# Altium PCB NEOIVClock.PcbDoc (part 1 of 2)
Units mm, origin at the board's own origin, x right, y up, seen from the top; angles counter-clockwise.
Board outline 205.8 x 119 mm, 2 copper layers (Top Layer, Bottom Layer); 87 components, 87 nets, 479 pads, 552 vias.
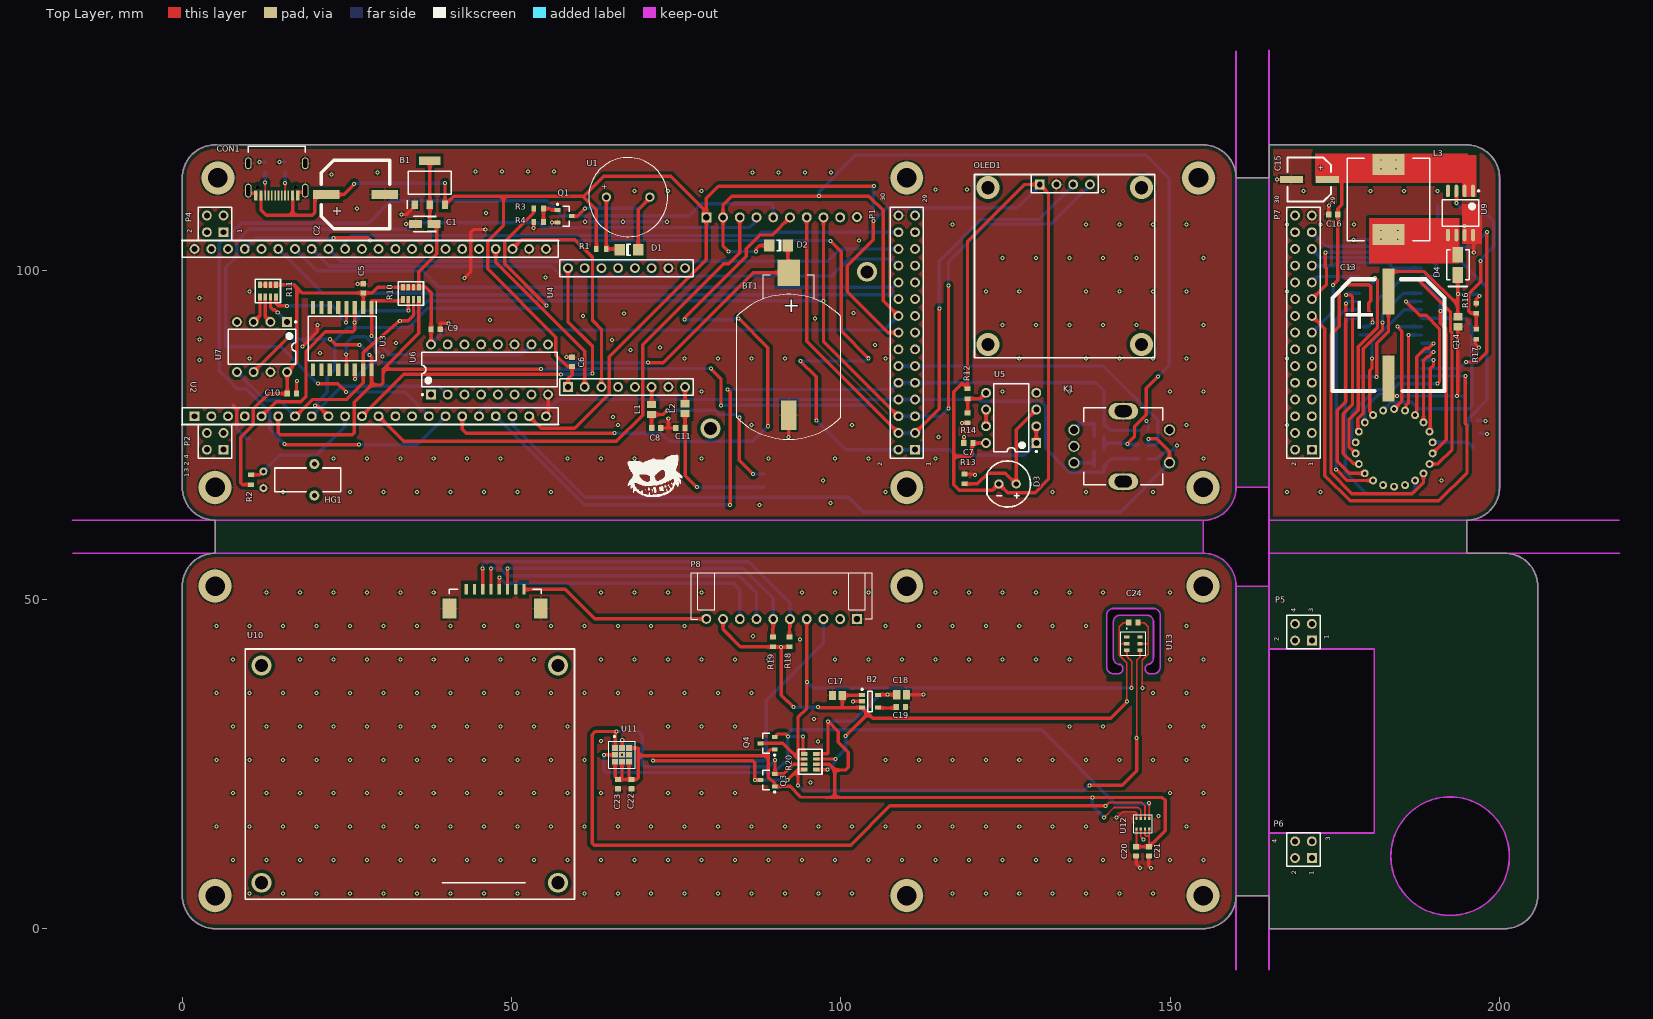
[diagram p0: Top Layer view]
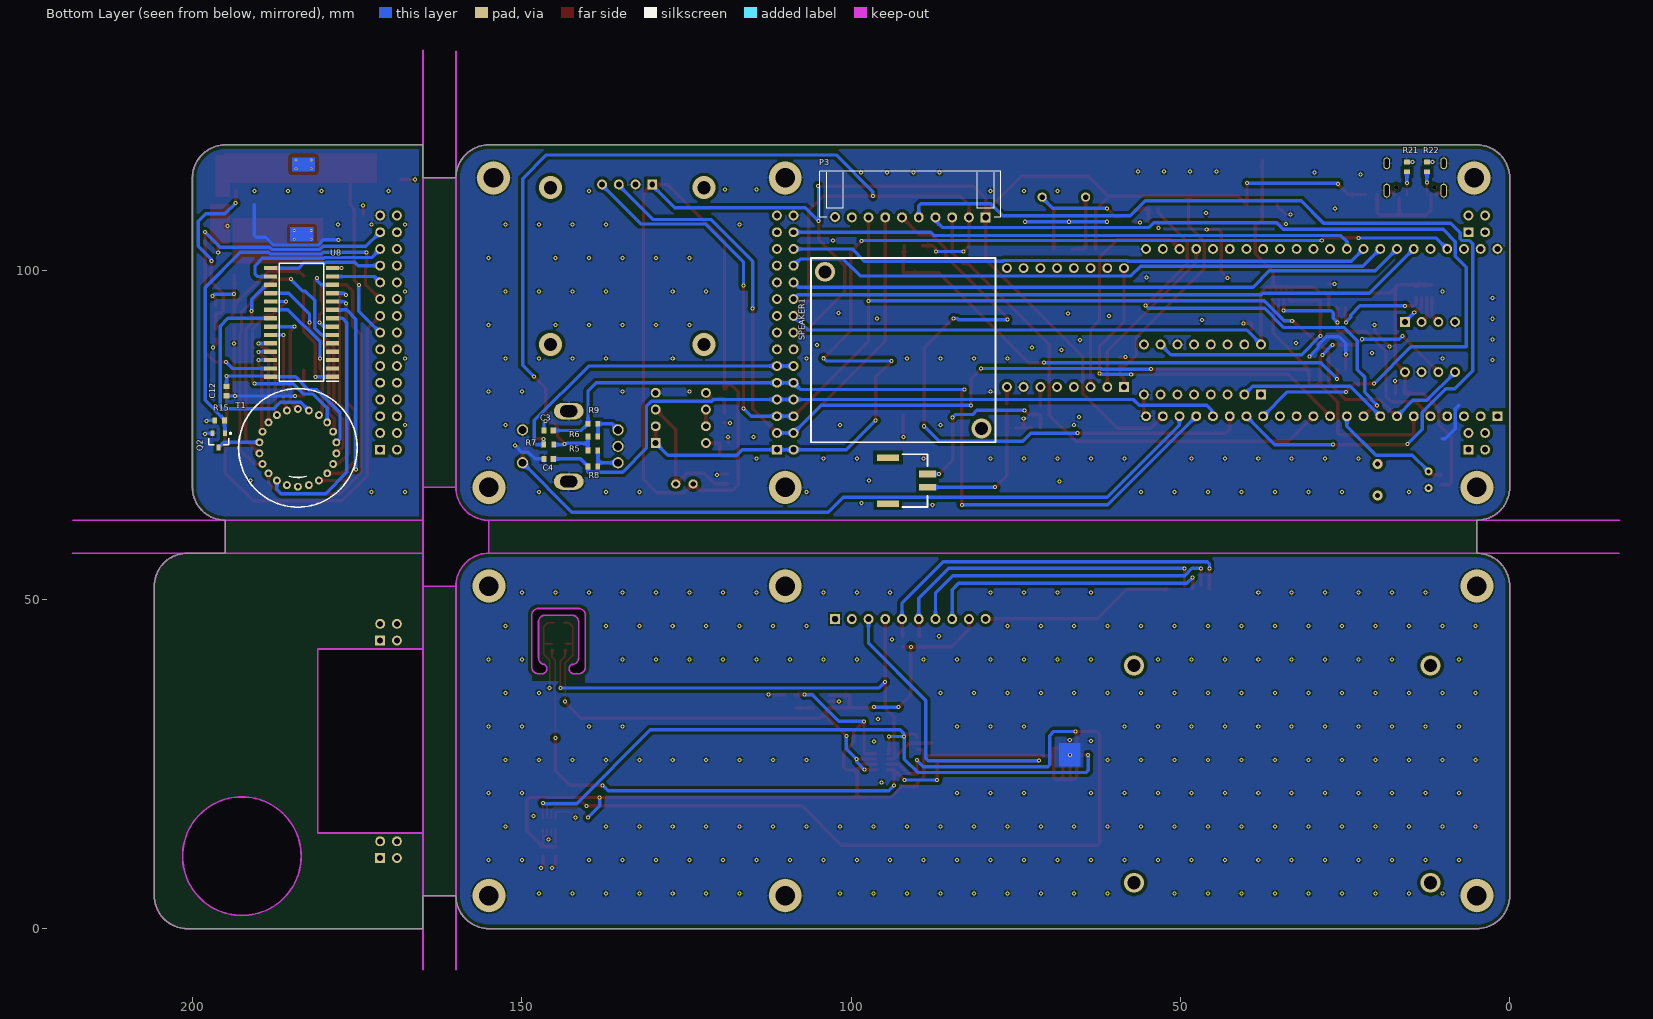
[diagram p1: Bottom Layer view, seen from below]

## Layer stack, top to bottom
Top Solder: solder mask 0.0102, Solder Resist, Dk 3.5
Top Layer: signal copper 0.0356
Dielectric 1: dielectric 0.32, FR-4, Dk 4.8
Bottom Layer: signal copper 0.0356
Bottom Solder: solder mask 0.0102, Solder Resist, Dk 3.5

## Board outline
5,0 cw(c5,5) 0,5 0,52 cw(c5,52) 5,57 5,62 cw(c5,67) 0,67 0,114 cw(c5,114) 5,119 155,119 cw(c155,114) 160,114 165,114 165,119 195,119 cw(c195,114) 200,114 200,67 cw(c195,67) 195,62 195,57 200.8,57 cw(c200.8,52) 205.8,52 205.8,5 cw(c200.8,5) 200.8,0 165,0 165,5 160,5 cw(c155,5) 155,0
cut-out: 155,57 cw(c155,52) 160,52 165,52 164.991,52.009 164.991,57 165,57 165,67 160,67 cw(c155,67) 155,62
cut-out: 183.5,11 ccw(c192.5,11) 192.5,2 ccw(c192.5,11) 201.5,11 ccw(c192.5,11) 192.5,20 ccw(c192.5,11)
cut-out: 140.351,39.719 ccw(c141.367,39.719) 141.367,38.703 142.053,38.703 ccw(c142.053,39.465) 142.456,40.112 142.383,40.1 cw(c142.383,41.116) 141.367,41.116 141.367,46.577 cw(c142.383,46.577) 142.383,47.593 146.447,47.593 cw(c146.447,46.577) 147.463,46.577 147.463,41.122 cw(c146.447,41.122) 146.518,40.108 146.552,40.112 ccw(c146.955,39.465) 146.955,38.703 146.955,38.697 147.457,38.697 147.463,38.703 ccw(c147.463,39.719) 148.479,39.719 148.479,47.593 ccw(c147.463,47.593) 147.463,48.609 141.367,48.609 ccw(c141.367,47.593) 140.351,47.593
cut-out: 165,14.53 165,42.47 181,42.47 181,14.53

## Design rules (kind name [scope] priority, off if disabled: settings)
Clearance Clearance_ROOM_BMP280 [All] p1: gap=0.17 ignorepadtopadclearanceinfootprint=TRUE except(0.508: Arc-Poly Track-Poly SMDPad-Poly THPad-Poly Via-Poly Fill-Poly Poly-Poly)
Clearance Clearance_BMP280 [HasFootprint('BMP280')] p2: gap=0.2 ignorepadtopadclearanceinfootprint=TRUE except(0.508: Arc-Poly Track-Poly SMDPad-Poly THPad-Poly Via-Poly Fill-Poly Poly-Poly)
Clearance Clearance_USB [HasFootprint('USB-TYPE_C')] p3: gap=0.17 ignorepadtopadclearanceinfootprint=TRUE except(0.508: Arc-Poly Track-Poly SMDPad-Poly THPad-Poly Via-Poly Fill-Poly Poly-Poly)
Clearance Clearance_8P4R [HasFootprint('8P4R 0603')] p4: gap=0.3 ignorepadtopadclearanceinfootprint=TRUE except(0.508: Arc-Poly Track-Poly SMDPad-Poly THPad-Poly Via-Poly Fill-Poly Poly-Poly)
Clearance [All] p5: gap=0.508 ignorepadtopadclearanceinfootprint=TRUE
ComponentClearance [All] p1: gap=0.254 collisioncheckmode=3 verticalgap=0 showdistances=FALSE donotcheckwithout3dbody=TRUE
HoleSize [All] p1: absolutevalues=TRUE maxlimit=3 minlimit=0.025 maxpercent=80.000 minpercent=20.000
MinimumSolderMaskSliver MinimumSolderMaskSliver_ENS60 [HasFootprint('ENS160')] p1: minsoldermaskwidth=0.1
MinimumSolderMaskSliver MinimumSolderMaskSliver_SOT23-5AL [HasFootprint('SOT23-5AL')] p2: minsoldermaskwidth=0.09
MinimumSolderMaskSliver MinimumSolderMaskSliver_BMP280 [HasFootprint('BMP280')] p3: minsoldermaskwidth=0.09
MinimumSolderMaskSliver MinimumSolderMaskSliver_R_PACK [HasFootprint('8P4R 0603')] p4: minsoldermaskwidth=0.04
MinimumSolderMaskSliver MinimumSolderMaskSliver_L [HasFootprint('CAPC2012L')] p5: minsoldermaskwidth=0.19
MinimumSolderMaskSliver MinimumSolderMaskSliver_USB [HasFootprint('USB-TYPE_C')] p6: minsoldermaskwidth=0.04
MinimumSolderMaskSliver [All] p7: minsoldermaskwidth=0.254
PolygonConnect [All] p1: connectstyle=Relief reliefconductorwidth=0.254 reliefentries=4 polygonreliefangle="90 Angle" airgapwidth=0.254
RoomDefinition RoomBMP280 [False] p1: confinementstyle=ConfineIn formatcopy=TRUE lockcomponents=FALSE outline 148.138,13.9 143.566,13.9 143.566,17.964 148.138,17.964
RoutingLayers RoutingLayers_EX_GND [InNetClass('GND')] p1: top layer_v5=FALSE bottom layer_v5=FALSE
RoutingLayers [All] p2: top layer_v5=TRUE bottom layer_v5=TRUE
RoutingPriority RoutingPriority_Clock [InNetClass('Clock')] p1: routingpriority=0
RoutingPriority RoutingPriority_I2C [InNetClass('I2C')] p2: routingpriority=1
RoutingPriority RoutingPriority_IV18 [InNetClass('IV18')] p3: routingpriority=2
RoutingPriority [All] p4: routingpriority=10
RoutingVias [All] p1: holewidth=0.305 width=0.61 viastyle="Through Hole" minholewidth=0.305 minwidth=0.61 maxholewidth=0.305 maxwidth=0.61
SMDEntry [All] p1: side=TRUE corner=TRUE anyangle=TRUE
SilkToSolderMaskClearance SilkToSolderMaskClearance_MAZ [HasFootprint('SOIC127P1032X265-28N')] p1: minsilkscreentomaskgap=0.1 clearancetoexposedcopper=TRUE
SilkToSolderMaskClearance SilkToSolderMaskClearance_2312 [HasFootprint('SOIC127P1032X265-16N')] p2: minsilkscreentomaskgap=0.1 clearancetoexposedcopper=TRUE
SilkToSolderMaskClearance SilkToSolderMaskClearance_BMP280 [HasFootprint('BMP280')] p3: minsilkscreentomaskgap=0.18 clearancetoexposedcopper=TRUE
SilkToSolderMaskClearance SilkToSolderMaskClearance_RES_PACK [HasFootprint('8P4R 0603')] p4: minsilkscreentomaskgap=0.1 clearancetoexposedcopper=TRUE
SilkToSolderMaskClearance SilkToSolderMaskClearance_CD3216-1206 [HasFootprint('CD3216-1206')] p5: minsilkscreentomaskgap=0.2 clearancetoexposedcopper=TRUE
SilkToSolderMaskClearance [IsPad] p6: minsilkscreentomaskgap=0.254 clearancetoexposedcopper=TRUE
SolderMaskExpansion [All] p1: expansion=0.102 istentingtop=FALSE
SupplyNets "Schematic Supply Nets_3" [InNet('5V')] p1: voltage=0.000
SupplyNets "Schematic Supply Nets_6" [InNet('B_1.8V')] p2: voltage=0.000
SupplyNets "Schematic Supply Nets_5" [InNet('R_GND')] p3: voltage=0.000
SupplyNets "Schematic Supply Nets_2" [InNet('GND')] p4: voltage=0.000
SupplyNets "Schematic Supply Nets_1" [InNet('B_3.3V')] p5: voltage=0.000
SupplyNets "Schematic Supply Nets" [InNet('B_GND')] p6: voltage=0.000
Width [All] p1: maxlimit=1.016 minlimit=0.254 preferedwidth=0.508
24 further rules are at their usual default settings.

## Classes and differential pairs
net class Clock: DS3231_32HZ DS3231_CLK DS3231_INT DS3231_RST
net class IV18: IV18_BLANK IV18_CLK IV18_DIN IV18_EN IV18_LOAD
net class I2C: B_I2C_SCL B_I2C_SDA I2C_SCL I2C_SDA
net class GND: B_GND GND R_GND
component class TopPannel: B1 BT1 C1 C2 C3 C4 C5 C6 C7 C8 C9 C10 C11 CON1 D1 D2 D3 "Header 2X2" HG1 K1 L1 L2 OLED1 P1 P2 P3 P4 P5 P6 Q1 R1 R2 R3 R4 R5 R6 R7 R8 R9 R10 R11 R12 R13 R14 R21 R22 SPEAKER1 U1 U2 U3 U4 U5 U6 U7
component class RightPannel: C12 C13 C14 C15 C16 D4 "Header 2X2" L3 P7 Q2 R15 R16 R17 T1 U8 U9
component class BottomPanel: B2 C17 C18 C19 C20 C21 C22 C23 C24 "Header 2X2" P8 Q3 Q4 R18 R19 R20 U10 U11 U12 U13

## Components (designator, comment, footprint, x,y, rotation, side; value= is the part's Value field where it differs from the comment)
B1 "AMS1117" SOT229P700X180-4N 37.592,113.236 r90 top
B2 "RT9193-18" SOT23-5AL 104.425,34.512 r0 top
BT1 "ML2032" BAT2025-2032-L 92.075,85.296 r0 top
C1 "16V" TC3216-1206 36.83,106.999 r180 top value=22uF
C2 "25V" SMD-EC-F10 21.874,111.458 r0 top value=470uF
C3 "50V" CAPC1608L 145.923,75.644 r180 bottom value=104
C4 "50V" CAPC1608L 145.923,71.326 r180 bottom value=104
C5 "50V" CAPC1608L 27.474,97.21 r270 top value=104
C6 "50V" CAPC1608L 59.196,86.058 r90 top value=104
C7 "50V" CAPC1608L 119.372,73.731 r0 top value=104
C8 "50V" CAPC1608L 71.961,76.025 r180 top value=104
C9 "50V" CAPC1608L 38.481,91.011 r180 top value=104
C10 "50V" CAPC1608L 16.637,81.232 r180 top value=104
C11 "50V" CAPC1608L 75.641,76.025 r180 top value=104
C12 "50V" CAPC1608L 194.818,81.613 r90 bottom value=104
C13 "100V" SMD-EC-F16 183.134,96.733 r270 top value=220uF
C14 "100V" CAPC2012L 193.675,92.154 r90 top value=105
C15 "50V" SMD-EC-F6.3 173.863,113.744 r180 top value=47uF
C16 "50V" CAPC1608L 174.752,108.41 r0 top value=105
C17 "100V" CAPC2012L 99.472,35.401 r0 top value=105
C18 "100V" CAPC2012L 109.22,35.528 r180 top value=105
C19 "50V" CAPC1608L 109.093,33.623 r180 top value=223
C20 "50V" CAPC1608L 144.836,11.741 r90 top value=104
C21 "50V" CAPC1608L 146.765,11.741 r90 top value=104
C22 "50V" CAPC1608L 68.212,21.939 r90 top value=104
C23 "10V" CAPC1608L 66.18,21.939 r90 top value=106
C24 "10V" CAPC1608L 144.415,46.45 r180 top value=106
CON1 "USB-TYPEE_C" USB-TYPE_C 14.349,111.505 r180 top
D1 "S4" CD3216-1206 67.818,103.076 r180 top
D2 "S4" CD3216-1206 90.551,103.711 r0 top
D3 "5800B" 5800B 125.299,67.516 r180 top
D4 "SS310" DO-214AC-SMA 193.659,100.791 r90 top
HG1 "HG Switch" HG 19.05,68.151 r90 top
K1 "EC11" EC11 142.875,73.231 r270 top
L1 "400mA" CAPC2012L 71.261,78.819 r90 top value=600R
L2 "400mA" CAPC2012L 76.341,78.946 r90 top value=600R
L3 "4A" CYH125 183.134,110.696 r270 top value=33uH
OLED1 "OLED_96" OLED_96 134,113 r0 top
P1 "Header 15X2" HDR2X15 111.27,72.72 r90 top locked
P2 "Header 2X2" HDR2X2 6.27,72.72 r90 top locked
P3 "Header 10" XH254-W-10P 91,108 r0 bottom locked
P4 "Header 2X2" HDR2X2 6.27,105.74 r90 top
P5 "Header 2X2" HDR2X2 171.5,43.74 r90 top
P6 "Header 2X2" HDR2X2 171.5,10.72 r90 top
P7 "Header 15X2" HDR2X15 171.5,72.72 r90 top locked
P8 "Header 10" XH254-W-10P 91,47 r180 top locked
Q1 "S8050 (J3Y)" SOT-23B_L 58.039,108.17 r0 top
Q2 "AO3400" SOT-23B_L 196.021,74.135 r270 bottom
Q3 "SI2302" SOT-23B_L 88.862,22.555 r180 top
Q4 "SI2302" SOT-23B_L 88.862,28.143 r180 top
R1 "Res1" RESC1608L 63.627,103.203 r0 top value=10R
R2 "Res1" RESC1608L 10.414,68.163 r90 top value=10K
R3 "Res1" RESC1608L 54.102,109.313 r0 top value=1K
R4 "Res1" RESC1608L 54.102,107.281 r180 top value=100K
R5 "Res1" RESC1608L 139.192,72.596 r180 bottom value=10K
R6 "Res1" RESC1608L 139.192,74.755 r180 bottom value=10K
R7 "Res1" RESC1608L 145.923,73.485 r0 bottom value=10K
R8 "Res1" RESC1608L 139.192,70.183 r0 bottom value=10K
R9 "Res1" RESC1608L 139.192,76.66 r0 bottom value=10K
R10 "8P4R-10K" "8P4R 0603" 34.713,96.448 r270 top
R11 "8P4R-10K" "8P4R 0603" 12.996,96.829 r90 top
R12 "Res1" RESC1608L 119.253,81.224 r270 top value=10K
R13 "Res1" RESC1608L 118.745,68.278 r90 top value=4K7
R14 "Res1" RESC1608L 119.253,77.541 r270 top value=10K
R15 "Res1" RESC1608L 195.894,77.183 r0 bottom value=10K
R16 "Res1" RESC1608L 196.469,94.186 r270 top value=39K
R17 "Res1" RESC1608L 196.466,90.25 r270 top value=1K
R18 "Res1" RESC1608L 92.202,43.529 r90 top value=10K
R19 "Res1" RESC1608L 89.662,43.529 r270 top value=10K
R20 "8P4R-10K" "8P4R 0603" 95.339,25.349 r180 top
R21 "Res1" RESC1608L 15.621,115.649 r90 bottom value=5K1
R22 "Res1" RESC1608L 12.573,115.649 r90 bottom value=5K1
SPEAKER1 "SPEAKER" SPEAKER 92.075,87.836 r270 bottom locked
T1 "IV18" IV18 184,73 r90 bottom
U1 "BEEPER" BEEPER 67.691,111.077 r0 top
U2 "ESP32-S3-N16R8-BOARD" ESP32-S3-N16R8-BOARD 28.54,90.503 r90 top locked
U3 "DS3231SN#" SOIC127P1032X265-16N 24.299,89.59 r270 top
U4 "DPF_PLAYER" DPF_PLAYER 67.451,91.265 r90 top locked
U5 "LM358P" DIP-8 125.857,77.549 r180 top
U6 "CD4040BE" DIP-16 46.651,84.891 r90 top
U7 "AT24C32" DIP-8 12.107,88.32 r270 top
U8 "MAX6921AWI" SOIC127P1032X265-28N 183.448,92.042 r0 bottom
U9 "XL6007" SOP127P780-8L 194.075,108.665 r270 top
U10 "PMS5003ST" PMS5003ST 34.544,23.463 r180 top
U11 "ENS160" ENS160 66.768,26.384 r0 top
U12 "BMP280" BMP280 145.852,15.932 r90 top
U13 "AHT20" AHT20 144.415,43.275 r0 top

## Footprints (in the part's own frame and the unit in brackets; to place one, negate y for a bottom-side part, rotate by r counter-clockwise, add the part's x,y. Pads: shape width x height; smd on the part's side, far side on the other; paste and mask are expansions set on the pad)
"8P4R 0603" [mm] "1/10W贴片排阻"
  rect 1.016x0.6 smd: 1(-0.927,1.2) 4(-0.927,-1.2) 5(0.927,-1.2) 8(0.927,1.2)
  rect 1.016x0.5 smd: 2(-0.927,0.4) 3(-0.927,-0.4) 6(0.927,-0.4) 7(0.927,0.4)
  silkscreen extent -1.78,-1.9 1.78,1.91
5800B [mm]
  round 1.4 hole 0.8: 1(-1.32,0) 2(1.32,0)
  silkscreen extent -3.5,-3.5 3.11,3.5
AHT20 [mm] "AHT20"
  rect 0.8x0.5 smd: 1(-1,1) 2(-1,0) 3(-1,-1) 4(1,-1) 5(1,0) 6(1,1)
  silkscreen extent -1.9,-1.78 1.91,2.3, body extent -1.4,-1.52 1.4,1.52, height 1
BAT2025-2032-L [mm]
  rect 3.4x4 smd: 1(0,14.3)
  rect 2.4x4.5 smd: 2(0,-7.35)
  silkscreen extent -7.9,-11 7.9,13.95
BEEPER [mm] "BEEPER"
  round 1.4 hole 0.85: 1(-3.3,0) 2(3.3,0)
  silkscreen extent -6,-6 6,6
BMP280 [mm]
  rect 0.5x0.35 smd: 1(0.8,0.975) 2(0.8,0.325) 3(0.8,-0.325) 4(0.8,-0.975) 5(-0.8,-0.975) 6(-0.8,-0.325) 7(-0.8,0.325) 8(-0.8,0.975)
  silkscreen extent -1.4,-1.4 1.4,1.79, body extent -1.02,-1.14 1.02,1.14, height 1
CAPC1608L [mm] "Chip Capacitor, Body 1.6x0.8mm, IPC High Density"
  rect 0.8x0.9 smd: 1(-0.7,0) 2(0.7,0)
  body extent -0.87,-0.48 0.87,0.48, height 0.85
CAPC2012L [mm] "Chip Capacitor, Body 2.0x1.3mm, IPC High Density"
  rect 1.1x1.4 smd: 1(-0.75,0) 2(0.75,0)
  body extent -1.1,-0.72 1.1,0.72, height 1.1
CD3216-1206 [mm] "Chip Diode; Body 3.2 x 1.6 mm (LxW typ)"
  rect 1.6x1.8 smd: 1(-1.4,0) 2(1.4,0)
  silkscreen extent -0.3,-0.8 0.3,0.8
CYH125 [mm] "CYH125 Inductor"
  rect 3.2x4.9 smd: 1(-5.3,0) 2(5.3,0)
  silkscreen extent -6.25,-6.25 6.25,6.25
DIP-8 [mm] "DIP; 8 Leads; Row Spacing 7.62 mm; Pitch 2.54 mm"
  rect 1.5x1.5 hole 0.9: 1(-3.81,3.81)
  round 1.5 hole 0.9: 2(-3.81,1.27) 3(-3.81,-1.27) 4(-3.81,-3.81) 5(3.81,-3.81) 6(3.81,-1.27) 7(3.81,1.27) 8(3.81,3.81)
  silkscreen extent -3.94,-5.15 2.65,5.23, body extent -3.6,-5.15 3.6,5.15, height 5.08
DIP-16 [mm] "DIP; 16 Leads; Row Spacing 7.62 mm; Pitch 2.54 mm"
  rect 1.5x1.5 hole 0.9: 1(-3.81,8.89)
  round 1.5 hole 0.9: 2(-3.81,6.35) 3(-3.81,3.81) 4(-3.81,1.27) 5(-3.81,-1.27) 6(-3.81,-3.81) 7(-3.81,-6.35) 8(-3.81,-8.89) 9(3.81,-8.89) 10(3.81,-6.35) 11(3.81,-3.81) 12(3.81,-1.27) 13(3.81,1.27) 14(3.81,3.81) 15(3.81,6.35) 16(3.81,8.89)
  silkscreen extent -3.93,-10.3 2.65,10.31, body extent -3.6,-10.28 3.6,10.28, height 5.08
DO-214AC-SMA [mm] "Molded Diode, 2-Leads, Body 4.25x2.67mm, IPC Medium Density"
  rect 2.4x1.55 smd: 1(1.525,0) 2(-1.525,0)
  silkscreen extent -3.3,-1.78 2.25,1.65, body extent -2.25,-1.4 2.25,1.39, height 2.29
DPF_PLAYER [mm] "DPF_PLAYER"
  rect 1.5x1.5 hole 0.9: 1(-9.017,8.89)
  round 1.5 hole 0.9: 2(-9.017,6.35) 3(-9.017,3.81) 4(-9.017,1.27) 5(-9.017,-1.27) 6(-9.017,-3.81) 7(-9.017,-6.35) 8(-9.017,-8.89) 9(9.017,-8.89) 10(9.017,-6.35) 11(9.017,-3.81) 12(9.017,-1.27) 13(9.017,1.27) 14(9.017,3.81) 15(9.017,6.35) 16(9.017,8.89)
  silkscreen extent -10.29,-10.16 10.29,10.16
EC11 [mm] "EC11"
  oval 2.5x4.5 hole 1.8 slot 2.6 at 90 deg: 1(-5.35,0) 1(5.35,0)
  round 1.7 hole 1.2: 2(-2.5,7) 3(2.5,7) 4(-2.5,-7.5) 5(0,-7.5) 6(2.5,-7.5)
  silkscreen extent -5.85,-6 5.85,6, body extent -5.84,-5.97 5.84,5.97, height 5
ENS160 [mm]
  rect 0.9x0.85 smd mask+0: 1(-1.05,1.05) 2(-1.05,0) 3(-1.05,-1.05) 4(0,-1.05) 5(1.05,-1.05) 6(1.05,0) 7(1.05,1.05) 8(0,1.05) 9(0,0)
  silkscreen extent -2.03,-2.03 2.03,2.92, body extent -1.65,-1.78 1.65,1.78, height 0.9
ESP32-S3-N16R8-BOARD [mm]
  rect 1.5x1.5 hole 0.9: 1(-12.7,26.67)
  round 1.5 hole 0.9: 2(-12.7,24.13) 3(-12.7,21.59) 4(-12.7,19.05) 5(-12.7,16.51) 6(-12.7,13.97) 7(-12.7,11.43) 8(-12.7,8.89) 9(-12.7,6.35) 10(-12.7,3.81) 11(-12.7,1.27) 12(-12.7,-1.27) 13(-12.7,-3.81) 14(-12.7,-6.35) 15(-12.7,-8.89) 16(-12.7,-11.43) 17(-12.7,-13.97) 18(-12.7,-16.51) 19(-12.7,-19.05) 20(-12.7,-21.59) 21(-12.7,-24.13) 22(-12.7,-26.67) 23(12.7,-26.67) 24(12.7,-24.13) 25(12.7,-21.59) 26(12.7,-19.05) 27(12.7,-16.51) 28(12.7,-11.43) 28(12.7,-13.97) 30(12.7,-8.89) 31(12.7,-6.35) 32(12.7,-3.81) 33(12.7,-1.27) 34(12.7,1.27) 35(12.7,3.81) 36(12.7,6.35) 37(12.7,8.89) 38(12.7,11.43) 39(12.7,13.97) 40(12.7,16.51) 41(12.7,19.05) 42(12.7,21.59) 43(12.7,24.13) 44(12.7,26.67)
  silkscreen extent -13.97,-28.57 13.97,28.58
HDR2X2 [mm] "Connector; Header; 2x2 Position"
  rect 1.5x1.5 hole 0.9: 1(0,0)
  round 1.5 hole 0.9: 2(0,2.54) 3(2.54,0) 4(2.54,2.54)
  silkscreen extent -1.27,-1.27 3.81,3.81
HDR2X15 [mm] "Connector; Header; 15x2 Position"
  rect 1.5x1.5 hole 0.9: 1(0,0)
  round 1.5 hole 0.9: 2(0,2.54) 3(2.54,0) 4(2.54,2.54) 5(5.08,0) 6(5.08,2.54) 7(7.62,0) 8(7.62,2.54) 9(10.16,0) 10(10.16,2.54) 11(12.7,0) 12(12.7,2.54) 13(15.24,0) 14(15.24,2.54) 15(17.78,0) 16(17.78,2.54) 17(20.32,0) 18(20.32,2.54) 19(22.86,0) 20(22.86,2.54) 21(25.4,0) 22(25.4,2.54) 23(27.94,0) 24(27.94,2.54) 25(30.48,0) 26(30.48,2.54) 27(33.02,0) 28(33.02,2.54) 29(35.56,0) 30(35.56,2.54)
  silkscreen extent -1.27,-1.27 36.83,3.81
HG [mil] "HG Switch"
  round 60 hole 30: 0(-94.49,-39.37) 0(94.49,-39.37)
  round 47.24 hole 23.62: 1(-50,265) 2(50,265)
  silkscreen extent -71,-197 71,197
IV18 [mm] "IV18"
  round 1.2 hole 0.6: 1(0.84,-5.84) 2(-0.839,-5.84) 3(-2.45,-5.367) 4(-3.863,-4.459) 5(-4.963,-3.19) 6(-5.661,-1.663) 7(-5.9,0) 8(-5.661,1.662) 9(-4.964,3.189) 10(-3.864,4.459) 11(-2.451,5.367) 12(-0.84,5.84) 13(0.84,5.84) 14(2.451,5.367) 15(3.864,4.459) 16(4.963,3.19) 17(5.661,1.662) 18(5.9,0) 19(5.661,-1.661) 20(4.964,-3.189) 21(3.864,-4.458) 22(2.452,-5.367)
  silkscreen extent -9,-9 9,9
OLED_96 [mm] "OLED_96"
  rect 1.5x1.5 hole 0.9: 1(-3.81,0)
  round 1.5 hole 0.9: 2(-1.27,0) 3(1.27,0) 4(3.81,0)
  silkscreen extent -13.72,-26.3 13.65,1.52, body extent -13.72,-26.29 13.72,1.57, height 2.7
PMS5003ST [mm]
  rect 2.1x3 smd: 0(-19.879,-25.146) 0(-6.029,-25.146)
  rect 0.5x1.6 smd: 1(-17.329,-28.046) 2(-16.079,-28.046) 3(-14.829,-28.046) 4(-13.579,-28.046) 5(-12.329,-28.046) 6(-11.079,-28.046) 7(-9.829,-28.046) 8(-8.579,-28.046)
  silkscreen extent -25,-28.07 25,19
RESC1608L [mm] "Chip Resistor, Body 1.6x0.8mm, IPC High Density"
  rect 0.7x0.9 smd: 1(-0.75,0) 2(0.75,0)
  body extent -0.85,-0.48 0.85,0.48, height 0.6
SMD-EC-F6.3 [mm]
  rect 3.5x1 smd: 1(0,0) 2(5.475,0)
  silkscreen extent -0.56,-3.31 6.04,3.31
SMD-EC-F10 [mm]
  rect 4x1.4 smd: 1(0,0) 2(8.86,0)
  silkscreen extent -0.78,-5.2 9.62,5.2
SMD-EC-F16 [mm]
  rect 7x1.8 smd: 1(0,0) 2(13.215,0)
  silkscreen extent -1.88,-8.5 15.12,8.5
SOIC127P1032X265-16N [mm]
  rect 1.925x0.65 smd: 1(-4.712,4.445) 2(-4.712,3.175) 3(-4.712,1.905) 4(-4.712,0.635) 5(-4.712,-0.635) 6(-4.712,-1.905) 7(-4.712,-3.175) 8(-4.712,-4.445) 9(4.712,-4.445) 10(4.712,-3.175) 11(4.712,-1.905) 12(4.712,-0.635) 13(4.712,0.635) 14(4.712,1.905) 15(4.712,3.175) 16(4.712,4.445)
  silkscreen extent -5.68,-5.15 3.4,5.15
SOIC127P1032X265-28N [mm]
  rect 1.925x0.65 smd: 1(-4.712,8.255) 2(-4.712,6.985) 3(-4.712,5.715) 4(-4.712,4.445) 5(-4.712,3.175) 6(-4.712,1.905) 7(-4.712,0.635) 8(-4.712,-0.635) 9(-4.712,-1.905) 10(-4.712,-3.175) 11(-4.712,-4.445) 12(-4.712,-5.715) 13(-4.712,-6.985) 14(-4.712,-8.255) 15(4.712,-8.255) 16(4.712,-6.985) 17(4.712,-5.715) 18(4.712,-4.445) 19(4.712,-3.175) 20(4.712,-1.905) 21(4.712,-0.635) 22(4.712,0.635) 23(4.712,1.905) 24(4.712,3.175) 25(4.712,4.445) 26(4.712,5.715) 27(4.712,6.985) 28(4.712,8.255)
  silkscreen extent -5.67,-8.95 3.4,8.95
SOP127P780-8L [mm] "SOP, 8-Leads, Body 5.3x5.3mm, Pitch 1.27mm, IPC High Density"
  oval 1.9x0.6 smd: 1(-3.35,1.905) 2(-3.35,0.635) 3(-3.35,-0.635) 4(-3.35,-1.905) 5(3.35,-1.905) 6(3.35,-0.635) 7(3.35,0.635) 8(3.35,1.905)
  silkscreen extent -3.47,-2.75 2,2.88, body extent -2.73,-2.75 2.73,2.75, height 2.03
SOT23-5AL [mm] "SOT23, 5-Leads, Body 2.9x1.6mm, Pitch 0.95mm, Lead Span 2.8mm, IPC High Density"
  rect 0.9x0.65 smd: 1(-1.2,0.95) 2(-1.2,0) 3(-1.2,-0.95) 4(1.2,-0.95) 5(1.2,0.95)
  silkscreen extent -1.32,-1.55 0.35,1.95, body extent -0.9,-1.55 0.9,1.55, height 1.45
SOT229P700X180-4N [mm]
  rect 1.3x0.95 smd: 1(-3.35,2.29) 2(-3.35,0) 3(-3.35,-2.29)
  rect 1.3x3.25 smd: 4(3.35,0)
  silkscreen extent -3.97,-3.25 1.75,3.43
SOT-23B_L [mm] "SOT23, 3-Leads, Body 2.9x1.3mm, Pitch 0.95mm, Lead Span 2.4mm, IPC High Density"
  rect 0.85x0.6 smd: 1(-1.075,0.95) 2(-1.075,-0.95) 3(1.075,0)
  silkscreen extent -1.2,-1.5 0.7,1.92, body extent -0.7,-1.5 0.7,1.5, height 1.14
SPEAKER [mm]
  rect 1x3.4 smd: 0(16.312,-2.317) 0(23.312,-2.317)
  rect 1x2.6 smd: 1(20.812,3.683) 2(18.812,3.683)
  silkscreen extent -14,-14 23.81,14, body extent -14.1,-14.1 23.75,13.97, height 10
TC3216-1206 [mm] "Capacitor, SM Tantalum; Body 3.2 x 1.6 mm (LxW typ)"
  rect 2x1.2 smd: 1(-1.4,0) 2(1.4,0)
  silkscreen extent -1.7,-1.15 1.7,1.15
USB-TYPE_C [mm]
  oval 1x2.1 hole 0.6 slot 1.7 at 90 deg: 1(-4.32,-0.55) 1(4.32,-0.55)
  oval 1x1.8 hole 0.6 slot 1.4 at 90 deg: 1(-4.32,-4.7) 1(4.32,-4.7)
  rect 0.5x1.5 smd: 2(-3.2,0.2) 3(-2.4,0.2) 12(2.4,0.2) 13(3.2,0.2)
  rect 0.25x1.5 smd: 4(-1.75,0.2) 5(-1.25,0.2) 6(-0.75,0.2) 7(-0.25,0.2) 8(0.25,0.2) 9(0.75,0.2) 10(1.25,0.2) 11(1.75,0.2)
  silkscreen extent -4.32,-7.3 4.32,-6.35, body extent -4.32,-7.37 4.32,0.13, height 3.26
XH254-W-10P [mm] "X254-10P"
  rect 1.5x1.524 hole 0.9: 1(-11.43,0)
  oval 1.5x1.524 hole 0.9: 2(-8.89,0) 3(-6.35,0) 4(-3.81,0) 5(-1.27,0) 6(1.27,0) 7(3.81,0) 8(6.35,0) 9(8.89,0) 10(11.43,-0.041)
  silkscreen extent -13.74,-7 13.74,0, body extent -13.72,-6.98 13.72,0, height 5.8

## Part data
B1: "1117", Manufacturer_Name="Advanced Monolithic Systems", Datasheet Link=https://datasheet.lcsc.com/szlcsc/Advanced-Monolithic-Systems-AMS-AMS1117-ADJ_C6188.pdf, Geometry.Height=1.8mm, Manufacturer_Part_Number=AMS1117
BT1: library part Battery, "Multicell Battery", LatestRevisionDate=17-Jul-2002, LatestRevisionNote="Re-released for DXP Platform.", PackageDescription="Battery; 2 Leads", PackageReference=BAT-2, Published=24-Mar-1999, Publisher="Altium Limited"
C1 C2 C13 C15: library part "Cap Pol1", "Polarized Capacitor (Radial)", LatestRevisionDate=17-Jul-2002, LatestRevisionNote="Re-released for DXP Platform.", PackageDescription="Polarized Capacitor (Radial); 2 Leads", PackageReference=RB7.6-15, Published=8-Jun-2000, Publisher="Altium Limited"
C3 C4 C5 C6 C7 C8 C9 C10 C11 C12 C14 C16 C17 C18 C19 C20 C21 C22 C23 C24: library part Cap, "Capacitor", LatestRevisionDate=17-Jul-2002, LatestRevisionNote="Re-released for DXP Platform.", PackageDescription="Radial Cap, Thru-Hole; 2 Leads; 0.3 in Pin Spacing", PackageReference=RAD-0.3, Published=8-Jun-2000, Publisher="Altium Limited"
D1 D2 D4: library part "D Schottky", "Schottky Diode", Code_JEDEC=DO-214-AA, LatestRevisionDate=17-Jul-2002, LatestRevisionNote="Re-released for DXP Platform.", PackageDescription="DO-214-AA/SMB; 2 C-Bend Leads; Body 5.3 x 3.6 mm, inc. leads (LxW)", PackageReference=SMB, Published=8-Jun-2000, Publisher="Altium Limited"
D3: library part Diode, "Default Diode", Code_JEDEC=DO-214-AB, LatestRevisionDate=17-Jul-2002, LatestRevisionNote="Re-released for DXP Platform.", PackageDescription="DO-214-AB/SMC; 2 C-Bend Leads; Body 7.9 x 5.9 mm, inc. leads (LxW)", PackageReference=SMC, PackageVersion=Sep-1996, Published=8-Jun-2000, Publisher="Altium Limited"
HG1: library part HG
L1 L2 L3: library part Inductor, "Inductor", Code_IEC=1005, Code_JEITA=0402, LatestRevisionDate=29-May-2009, LatestRevisionNote="IPC-7351 Footprint Added.", PackageDescription="Chip Inductor", PackageReference=0402-A, Published=8-Jun-2000, Publisher="Altium Limited"
P1 P7: "Header, 15-Pin, Dual row", LatestRevisionDate=17-Jul-2002, LatestRevisionNote="Re-released for DXP Platform.", Publisher="Altium Limited"
P2 P4 P5 P6: "Header, 2-Pin, Dual row", LatestRevisionDate=17-Jul-2002, LatestRevisionNote="Re-released for DXP Platform.", Publisher="Altium Limited"
P3 P8: "Header, 10-Pin", LatestRevisionDate=17-Jul-2002, LatestRevisionNote="Re-released for DXP Platform.", Publisher="Altium Limited"
Q1: library part NPN, "NPN Bipolar Transistor", Code_JEDEC=TO-226-AA, LatestRevisionDate=17-Jul-2002, LatestRevisionNote="Re-released for DXP Platform.", PackageDescription="TO, Flat Index; 3 In-Line, Axial Leads; Body Dia. 4.8mm; Leads 0.55 x 0.51 mm (max)", PackageReference=TO-226-AA, Published=8-Jun-2000, Publisher="Altium Limited"
Q2 Q3 Q4: library part MOSFET-N, "N-Channel MOSFET", LatestRevisionDate=17-Jul-2002, LatestRevisionNote="Re-released for DXP Platform.", PackageDescription="TO, Flat Index; 3 In-Line, Axial Leads; Body Dia. 4.6mm; Lead Dia. 0.5 mm (max)", PackageReference=E3, PackageVersion=1995/1996, Published=8-Jun-2000, Publisher="Altium Limited"
R1 R2 R3 R4 R5 R6 R7 R8 R9 R12 R13 R14 R15 R16 R17 R18 R19 R21 R22: "Resistor", LatestRevisionDate=17-Jul-2002, LatestRevisionNote="Re-released for DXP Platform.", PackageDescription="Axial Device, Thru-Hole; 2 Leads; 0.3 in Pin Spacing", PackageReference=AXIAL-0.3, Published=8-Jun-2000, Publisher="Altium Limited"
R10 R11 R20: library part 8P4R
U3: "Real Time Clock Serial Maxim DS3231SN# Real Time Clock, Battery Backup, Calendar, Clock, I2C, 5.5 V, 16-Pin SOIC", Manufacturer_Name="Analog Devices", Mouser Part Number=700-DS3231SN#, Arrow Part Number=DS3231SN#, Arrow Price/Stock=https://www.arrow.com/en/products/ds3231sn_2/analog-devices.html?utm_currency=USD&region=nac, Datasheet Link=https://datasheets.maximintegrated.com/en/ds/DS3231.pdf, Geometry.Height=2.65mm, Manufacturer_Part_Number=DS3231SN#, Mouser Price/Stock=https://www.mouser.co.uk/ProductDetail/Analog-Devices-Maxim-Integrated/DS3231SN?qs=1eQvB6Dk1vhUlr8%2FOrV0Fw%3D%3D

## Via types
v1: diameter 0.61, hole 0.305, Top Layer to Bottom Layer, 519 vias
v2: diameter 5, hole 3, Top Layer to Bottom Layer, 12 vias
v3: diameter 0.4, hole 0.2, Top Layer to Bottom Layer, 8 vias
v4: diameter 3, hole 2, Top Layer to Bottom Layer, 6 vias
v5: diameter 3.5, hole 2, Top Layer to Bottom Layer, 4 vias
v6: diameter 0.65, hole 0.65, Top Layer to Bottom Layer, 2 vias
v7: diameter 0.61, hole 0.35, Top Layer to Bottom Layer, 1 vias

## Nets (pads, with @x,y where several pads share a name; then routed paths per layer and width w, separated by ;. In a path a pad name is that pad's centre, name@x,y a point inside that pad or via, vN(x,y) a via of type N, cw(c..) or ccw(c..) an arc to the next point about the centre after c; other vN are vias at no path point)
3.3V: B1.2 B1.4 C1.1 C5.2 C9.2 C10.2 D2.1 P1.18 P3.2 R2.1 R5.1 R6.1 R7.1 R10.1 R10.2 R10.3 R10.4 R11.5 R11.6 R11.7 R11.8 U3.2 U6.16 U7.8 | length 332.5
  Top Layer w0.508: R2.1@10.414,67.413 9.174,67.413 8.877,67.711 8.877,74.615 10.795,76.533 10.795,78.916 13.111,81.232 C10.2@15.937,81.232 15.937,82.844 15.917,82.864 U7.8@15.917,84.51 17.399,85.992 17.399,97.361 ; R11.8@11.796,97.756 12.17,97.756 R11.7@12.596,97.756 12.596,97.753 13.396,97.753 R11.6@13.396,97.756 R11.5@14.196,97.756 17.004,97.756 17.399,97.361 ; R11.5@14.196,97.548 R11.5@14.242,97.502 ; U3.2@27.474,94.302 C5.2@27.474,96.51 ; B1.4@37.592,116.586 B1.2@37.592,109.886 37.592,107.637 C1.1@38.23,106.999 38.612,106.999 38.612,102.459 35.913,99.76 R10.1@35.913,97.375 ; U6.16@37.761,88.701 37.761,89.829 37.781,89.849 C9.2@37.781,91.011 37.781,96.537 36.943,97.375 R10.1@35.913,97.375 ; v1(82.931,102.822) 82.11,103.643 82.11,109.92 83.405,111.215 91.037,111.215 ; v1(87.122,102.822) 87.142,102.842 87.142,103.264 87.589,103.711 D2.1@89.151,103.711 ; 91.088,111.215 v1(96.702,111.215) 104.256,111.215 106.426,109.045 106.426,95.344 P1.18@108.73,93.04 ; v1(143.51,73.612) 144.575,74.677 144.575,76.23 146.346,78.001 146.346,82.036 v1(148.137,83.827) ; 17.399,97.361 18.25,96.51 C5.2@27.474,96.51 ; C5.2@27.474,96.51 28.783,96.51 29.646,97.372 33.513,97.372 R10.4@33.513,97.375 R10.3@34.313,97.375 34.313,97.372 35.113,97.372 R10.2@35.113,97.375 R10.1@35.913,97.375
  Bottom Layer w0.508: U6.16@37.761,88.701 39.955,90.895 106.585,90.895 P1.18@108.73,93.04 ; v1(82.931,102.822) v1(87.122,102.822) ; v1(96.702,111.215) 96.702,111.894 102.283,117.475 146.256,117.475 149.86,113.871 149.86,85.55 v1(148.137,83.827) ; R5.1@139.942,72.596 139.942,73.676 ; R6.1@139.942,74.755 139.942,73.676 ; R7.1@145.173,73.485 143.665,73.485 143.538,73.612 v1(143.51,73.612) 143.49,73.632 143.209,73.632 143.165,73.676 139.942,73.676
5V: B1.3 C2.1 C6.1 C7.2 CON1.3 CON1.12 D3.2 OLED1.1 P1.16 P3.1 R1.1 R12.1 U2.21 U4.1 U5.8 | length 383
  Top Layer w0.508: CON1.12@11.951,111.506 11.951,109.149 12.78,108.32 16.764,108.32 ; CON1.3@16.764,110.871 16.764,108.32 ; C2.1@20.128,111.52 20.128,108.726 19.722,108.32 16.764,108.32 ; C2.1@21.874,111.458 24.511,111.458 v1@26.162,113.109 ; v1(39.882,113.197) B1.3@39.882,109.886 41.2,111.204 48.761,111.204 ; U2.21@52.67,77.803 54.522,75.951 59.558,75.951 64.825,81.218 64.825,86.843 79.57,101.589 P3.1@79.57,108 ; U4.1@58.561,82.248 58.561,83.479 59.196,84.114 C6.1@59.196,85.358 58.424,85.358 56.722,87.06 56.722,89.829 46.355,100.196 46.355,104.346 48.761,106.752 48.761,111.204 ; R1.1@62.877,103.203 62.877,109.124 60.797,111.204 ; v1@104.902,107.521 104.902,104.6 100.965,100.663 100.965,96.726 107.191,90.5 P1.16@108.73,90.5 ; v1(104.996,112.765) 104.977,112.745 104.904,112.745 104.887,112.728 81.407,112.728 79.57,110.891 P3.1@79.57,108 ; 117.123,72.785 117.123,71.707 ; 117.123,72.836 117.123,81.466 ; 117.159,81.502 118.442,82.785 119.057,82.17 119.057,82.07 119.153,81.974 R12.1@119.253,81.974 ; R12.1@119.231,82.17 119.231,104.357 127.856,112.982 OLED1.1@130.172,112.982 ; U5.8@122.047,73.739 121.043,73.739 121.035,73.731 C7.2@120.072,73.731 119.926,73.585 119.926,72.005 119.628,71.707 117.123,71.707 ; OLED1.1@130.19,113 131.511,111.679 131.511,68.217 129.486,66.192 125.303,66.192 D3.2@123.979,67.516 123.025,66.562 117.936,66.562 117.123,67.375 117.123,71.707 ; 48.761,111.204 60.797,111.204 ; 60.797,111.204 60.967,111.204 64.015,114.252 74.168,114.252 79.208,109.212 79.208,108.362 P3.1@79.57,108
  Bottom Layer w0.508: v1@26.039,113.197 v1(39.882,113.197) ; v1(104.996,112.765) 104.996,112.737 104.929,112.67 v1(104.929,107.41) 106.973,109.454 126.806,109.454 OLED1.1@130.191,112.839
  other v1: 26.066,113.086
B_1.8V: B2.5 C18.2 C20.2 C21.2 C22.2 C23.2 Q3.1 Q4.1 R20.2 R20.4 U11.3 U11.4 U11.5 U11.7 U12.2 U12.5 U12.6 U12.8 | length 170.7
  Top Layer w0.254: v1(139.954,16.859) 141.478,18.383 145.161,18.383 145.527,18.017 U12.2@145.527,16.732 ; C20.2@144.877,12.534 U12.8@144.877,15.132 ; U12.6@146.177,15.132 146.177,14.214 146.326,14.065 146.662,14.065 146.827,13.9 ; C21.2@146.765,12.441 146.827,12.503 146.827,13.9 ; U12.5@146.827,15.132 146.827,13.9
  Top Layer w0.508: U11.3@65.718,25.334 65.718,23.051 66.13,22.639 C23.2@66.18,22.639 C22.2@68.162,22.639 ; C23.2@66.292,22.701 66.768,23.177 U11.4@66.768,25.334 ; U11.5@67.818,25.334 67.818,23.083 68.016,22.885 68.016,22.785 C22.2@68.162,22.639 ; U11.7@67.818,27.434 69.215,27.434 69.215,26.257 ; Q4.1@89.937,27.193 89.285,27.193 88.98,26.888 88.98,26.257 ; R20.2@96.266,24.949 98.209,24.949 99.06,24.098 ; R20.4@96.266,26.549 97.946,26.549 98.044,26.647 v1(98.044,31.464) 99.578,29.93 99.578,28.279 101.092,26.765 101.092,24.479 100.711,24.098 99.06,24.098 ; B2.5@105.625,35.462 105.691,35.528 v1(107.081,35.528) C18.2@108.47,35.528 ; C20.2@144.836,12.441 C21.2@146.765,12.441 ; C21.2@146.827,12.503 146.877,12.503 149.225,14.851 149.225,19.482 148.8,19.907 v1(138.176,19.907) 99.06,19.907 ; C22.2@68.162,22.639 C22.2@68.212,22.639 68.917,22.639 69.215,22.937 69.215,26.257 ; 69.215,26.257 88.98,26.257 ; 88.98,26.257 88.98,23.017 89.937,22.06 Q3.1@89.937,21.605 92.307,21.605 93.787,20.125 93.932,19.981 97.663,19.907 99.06,19.907 ; 99.06,19.907 99.06,24.098
  Bottom Layer w0.508: v1(98.044,31.464) 101.854,31.464 105.918,35.528 v1(107.081,35.528) ; v1(138.176,19.907) 138.176,18.637 v1(139.954,16.859)
B_3.3V: B2.1 B2.3 C17.2 C24.2 P8.9 R18.1 R19.2 R20.1 R20.3 U13.2 | length 110.6
  Top Layer w0.254: U13.2@143.415,43.275 142.389,43.275 142.24,43.424 ; v1(143.443,34.452) 143.383,34.512 143.383,40.354 142.24,41.497 142.24,43.424 ; C24.2@143.715,46.45 142.875,46.45 142.24,45.815 142.24,43.424
  Top Layer w0.508: P8.9@82.11,47 82.11,45.42 84.751,42.779 R19.2@89.662,42.779 v1(90.932,42.779) ; R18.1@92.202,42.779 v1(90.932,42.779) ; v1(92.804,33.623) 91.917,34.51 91.823,34.51 90.932,35.401 v1(90.932,42.779) ; R20.1@96.266,24.149 97.968,24.149 v1(97.973,24.154) ; R20.3@96.266,25.749 v1(99.187,25.749) ; v1(96.554,33.67) 96.581,33.67 96.69,33.561 100.268,33.561 ; v1(100.715,29.255) 104.126,32.665 ; B2.3@103.204,33.562 103.215,33.552 104.126,32.665 ; B2.3@103.223,33.561 100.268,33.561 ; B2.1@103.225,35.462 103.195,35.432 100.252,35.432 C17.2@100.222,35.401 100.222,33.606 100.268,33.561 ; v1(143.443,34.452) 140.948,31.958 104.833,31.958 104.126,32.665
  Bottom Layer w0.508: v1(92.804,33.623) 96.479,33.623 96.526,33.67 v1(96.554,33.67) ; v1(97.973,24.154) 99.167,25.348 v1@99.167,25.729 ; v1(99.187,25.749) v1@99.167,25.729 ; v1(100.715,29.255) 100.715,27.277 v1@99.167,25.729
B_5V: P8.10 U10.1 | length 29.4
  Top Layer w0.508: U10.1@52,51.509 52,51.516 58.17,51.516 62.645,47.041 P8.10@79.57,47.041
B_GND: B2.2 C17.1 C18.1 C19.1 C20.1 C21.1 C22.1 C23.1 C24.1 P8.1 U10.0 U10.2 U11.8 U11.9 U12.1 U12.7 U13.5 | length 28
  Top Layer w0.254: U11.8@66.768,27.434 U11.8@66.802,27.468 ; v1(141.859,16.859) 142.748,17.748 144.728,17.748 144.877,17.599 U12.1@144.877,16.732 ; C24.1@145.115,46.45 146.05,46.45 146.685,45.815 146.685,43.424 ; U13.5@145.415,43.275 146.536,43.275 146.685,43.424 ; U12.7@145.527,15.132 145.527,13.953 v1(145.923,13.557) ; v1(145.796,36.544) 145.769,36.571 145.769,40.741 146.685,41.657 146.685,43.424
  Top Layer w0.508: U11.8@66.802,27.468 v1(66.802,28.67) ; v1@101.854,34.512 B2.2@103.225,34.512 ; C18.1@109.97,35.528 v1(112.522,35.528) ; C20.1@144.836,11.041 144.836,9.846 145.415,9.267 v1(145.415,9.239) ; C21.1@146.765,11.041 146.765,9.567 147.066,9.267 v1(147.066,9.239)
  other v1: 10.24,5.32 15.32,5.32 20.4,5.32 25.48,5.32 30.56,5.32 35.64,5.32 40.72,5.32 45.8,5.32 50.88,5.32 61.04,5.32 66.12,5.32 71.2,5.32 76.28,5.32 81.36,5.32 86.44,5.32 91.52,5.32 96.6,5.32 101.68,5.32 116.92,5.32 122,5.32 127.08,5.32 132.16,5.32 137.24,5.32 142.32,5.32 147.4,5.32 7.7,10.4 12.78,10.4 17.86,10.4 22.94,10.4 28.02,10.4 33.1,10.4 38.18,10.4 43.26,10.4 48.34,10.4 53.42,10.4 58.5,10.4 63.58,10.4 68.66,10.4 73.74,10.4 78.82,10.4 83.9,10.4 88.98,10.4 94.06,10.4 99.14,10.4 104.22,10.4 109.3,10.4 114.38,10.4 119.46,10.4 124.54,10.4 129.62,10.4 134.7,10.4 139.78,10.4 149.94,10.4 155.02,10.4 5.16,15.48 10.24,15.48 15.32,15.48 20.4,15.48 25.48,15.48 30.56,15.48 35.64,15.48 40.72,15.48 45.8,15.48 50.88,15.48 55.96,15.48 61.04,15.48 66.12,15.48 71.2,15.48 76.28,15.48 81.36,15.48 86.44,15.48 91.52,15.48 96.6,15.48 101.68,15.48 106.76,15.48 111.84,15.48 116.92,15.48 122,15.48 127.08,15.48 132.16,15.48 137.24,15.48 152.48,15.48 148.242,17.089 7.7,20.56 12.78,20.56 17.86,20.56 22.94,20.56 28.02,20.56 33.1,20.56 38.18,20.56 43.26,20.56 48.34,20.56 53.42,20.56 58.5,20.56 63.58,20.56 73.74,20.56 78.82,20.56 83.9,20.56 149.94,20.56 155.02,20.56 95.377,22.193 5.16,25.64 10.24,25.64 15.32,25.64 20.4,25.64 25.48,25.64 30.56,25.64 35.64,25.64 40.72,25.64 45.8,25.64 50.88,25.64 55.96,25.64 61.04,25.64 106.76,25.64 111.84,25.64 116.92,25.64 122,25.64 127.08,25.64 132.16,25.64 137.24,25.64 142.32,25.64 147.4,25.64 152.48,25.64 96.547,28.432 63.584,28.521 7.7,30.72 12.78,30.72 17.86,30.72 22.94,30.72 28.02,30.72 33.1,30.72 38.18,30.72 43.26,30.72 48.34,30.72 53.42,30.72 58.5,30.72 73.74,30.72 78.82,30.72 83.9,30.72 134.7,30.72 139.78,30.72 149.94,30.72 155.02,30.72 95.912,31.861 101.854,34.512 5.16,35.8 10.24,35.8 15.32,35.8 20.4,35.8 25.48,35.8 30.56,35.8 35.64,35.8 40.72,35.8 45.8,35.8 50.88,35.8 55.96,35.8 61.04,35.8 66.12,35.8 71.2,35.8 76.28,35.8 81.36,35.8 86.44,35.8 147.4,35.8 152.48,35.8 7.7,40.88 17.86,40.88 22.94,40.88 28.02,40.88 33.1,40.88 38.18,40.88 43.26,40.88 48.34,40.88 53.42,40.88 63.58,40.88 68.66,40.88 73.74,40.88 78.82,40.88 83.9,40.88 88.98,40.88 99.14,40.88 104.22,40.88 109.3,40.88 114.38,40.88 119.46,40.88 124.54,40.88 129.62,40.88 134.7,40.88 149.94,40.88 155.02,40.88 93.759,43.886 86.647,44.394 5.16,45.96 10.24,45.96 15.32,45.96 20.4,45.96 25.48,45.96 30.56,45.96 35.64,45.96 40.72,45.96 45.8,45.96 50.88,45.96 55.96,45.96 61.04,45.96 66.12,45.96 71.2,45.96 76.28,45.96 106.76,45.96 111.84,45.96 116.92,45.96 122,45.96 127.08,45.96 132.16,45.96 137.24,45.96 152.48,45.96 12.78,51.04 17.86,51.04 22.94,51.04 28.02,51.04 33.1,51.04 38.18,51.04 63.58,51.04 68.66,51.04 73.74,51.04 78.82,51.04 94.06,51.04 99.14,51.04 104.22,51.04 114.38,51.04 119.46,51.04 124.54,51.04 129.62,51.04 134.7,51.04 139.78,51.04 144.86,51.04 149.94,51.04
  other v2: 5,5 110,5 155,5 5,52 110,52 155,52
  other v7: 66.768,26.384
B_I2C_SCL: P8.4 Q4.3 R20.6 U13.3 | length 85.3
  Top Layer w0.254: U13.3@143.415,42.275 143.415,41.338 144.145,40.608 v1(144.145,36.544)
  Top Layer w0.508: Q4.3@87.787,28.143 91.19,28.143 93.476,25.857 ; R20.6@94.412,25.749 93.584,25.749 ; P8.4@94.81,47 94.81,33.419 93.476,32.085 93.476,25.857 ; U13.3@143.415,42.275 U13.3@143.438,42.275 ; 93.476,25.857 93.476,25.749 93.584,25.749 ; 93.476,25.857 93.584,25.749
  Bottom Layer w0.508: v1(94.832,37.47) 95.758,36.544 v1(144.145,36.544)
B_I2C_SCL_1.8: Q4.2 R20.5 U11.2 U12.4 | length 106.4
  Top Layer w0.254: v1(146.812,19.051) 146.827,19.036 U12.4@146.827,16.732
  Top Layer w0.508: v1@64.008,26.384 U11.2@65.718,26.384 ; Q4.2@89.937,29.093 90.062,29.093 90.108,29.139 90.108,29.261 90.406,29.559 91.567,29.559 v1(91.948,29.178) ; v1@94.234,29.15 94.234,26.595 94.28,26.549 R20.5@94.412,26.549
  Bottom Layer w0.508: v1(64.008,26.384) 64.008,24.015 64.306,23.717 89.916,23.717 91.948,25.749 v1(91.948,29.178) ; v1(94.234,29.178) v1(91.948,29.178) ; v1(146.812,19.051) 146.792,19.031 146.571,19.031 146.524,18.984 141.68,18.984 130.47,30.194 92.54,30.194 91.968,29.622 91.968,29.198 v1(91.948,29.178)
B_I2C_SDA: P8.3 Q3.3 R20.8 U13.4 | length 143.2
  Top Layer w0.254: v1(144.903,28.928) 144.907,28.932 144.907,40.735 145.415,41.243 U13.4@145.415,42.275
  Top Layer w0.508: v1(71.501,25.495) 86.625,25.495 86.923,25.197 v1(86.923,22.56) ; v1@86.923,22.555 Q3.3@87.787,22.555 ; v1(91.887,22.56) 93.476,24.149 ; v1(93.476,21.747) 93.476,24.149 ; R20.8@94.412,24.149 93.476,24.149 ; v1(137.723,21.747) 142.683,21.747 144.903,23.967 v1(144.903,28.928) ; U13.4@145.393,42.275 U13.4@145.415,42.275
  Bottom Layer w0.508: v1(71.501,25.495) 88.262,25.495 88.646,25.879 88.646,34.639 97.35,43.343 P8.3@97.35,47 ; v1(86.923,22.56) v1(91.887,22.56) ; v1(93.476,21.747) 94.3,20.923 136.898,20.923 v1(137.723,21.747)